# Altium PCB PCB_2020-01-04 23_18_01.pcbdoc
Units mil, origin at the board's own origin, x right, y up, seen from the top; angles counter-clockwise.
Board outline 5600 x 5600 mil, 2 copper layers (Top Layer, Bottom Layer); 60 components, 48 nets, 177 pads, 16 vias.
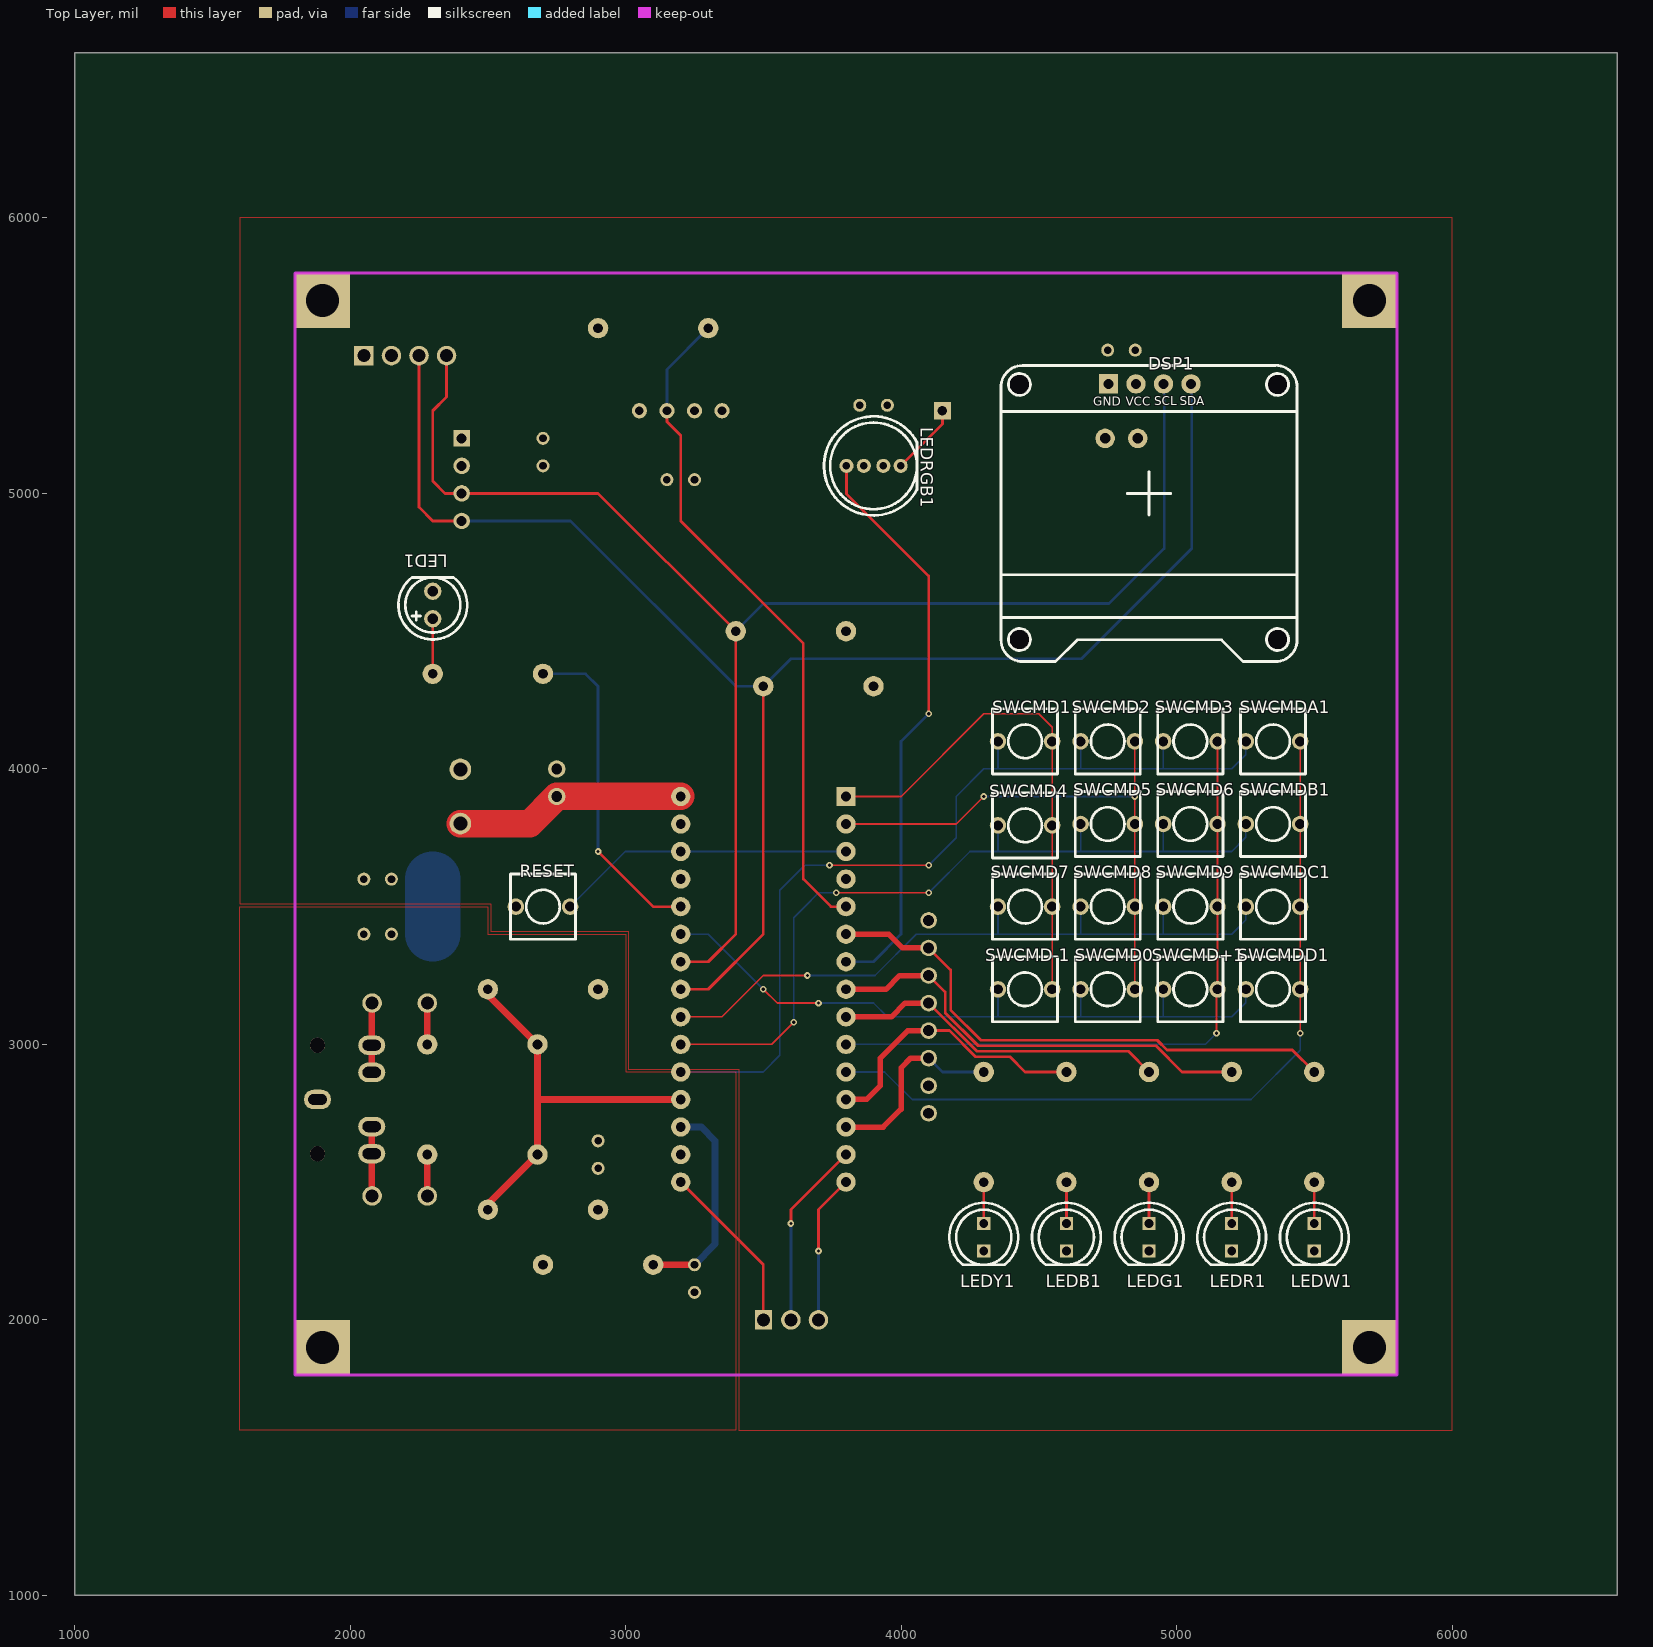
[diagram p0: Top Layer view]
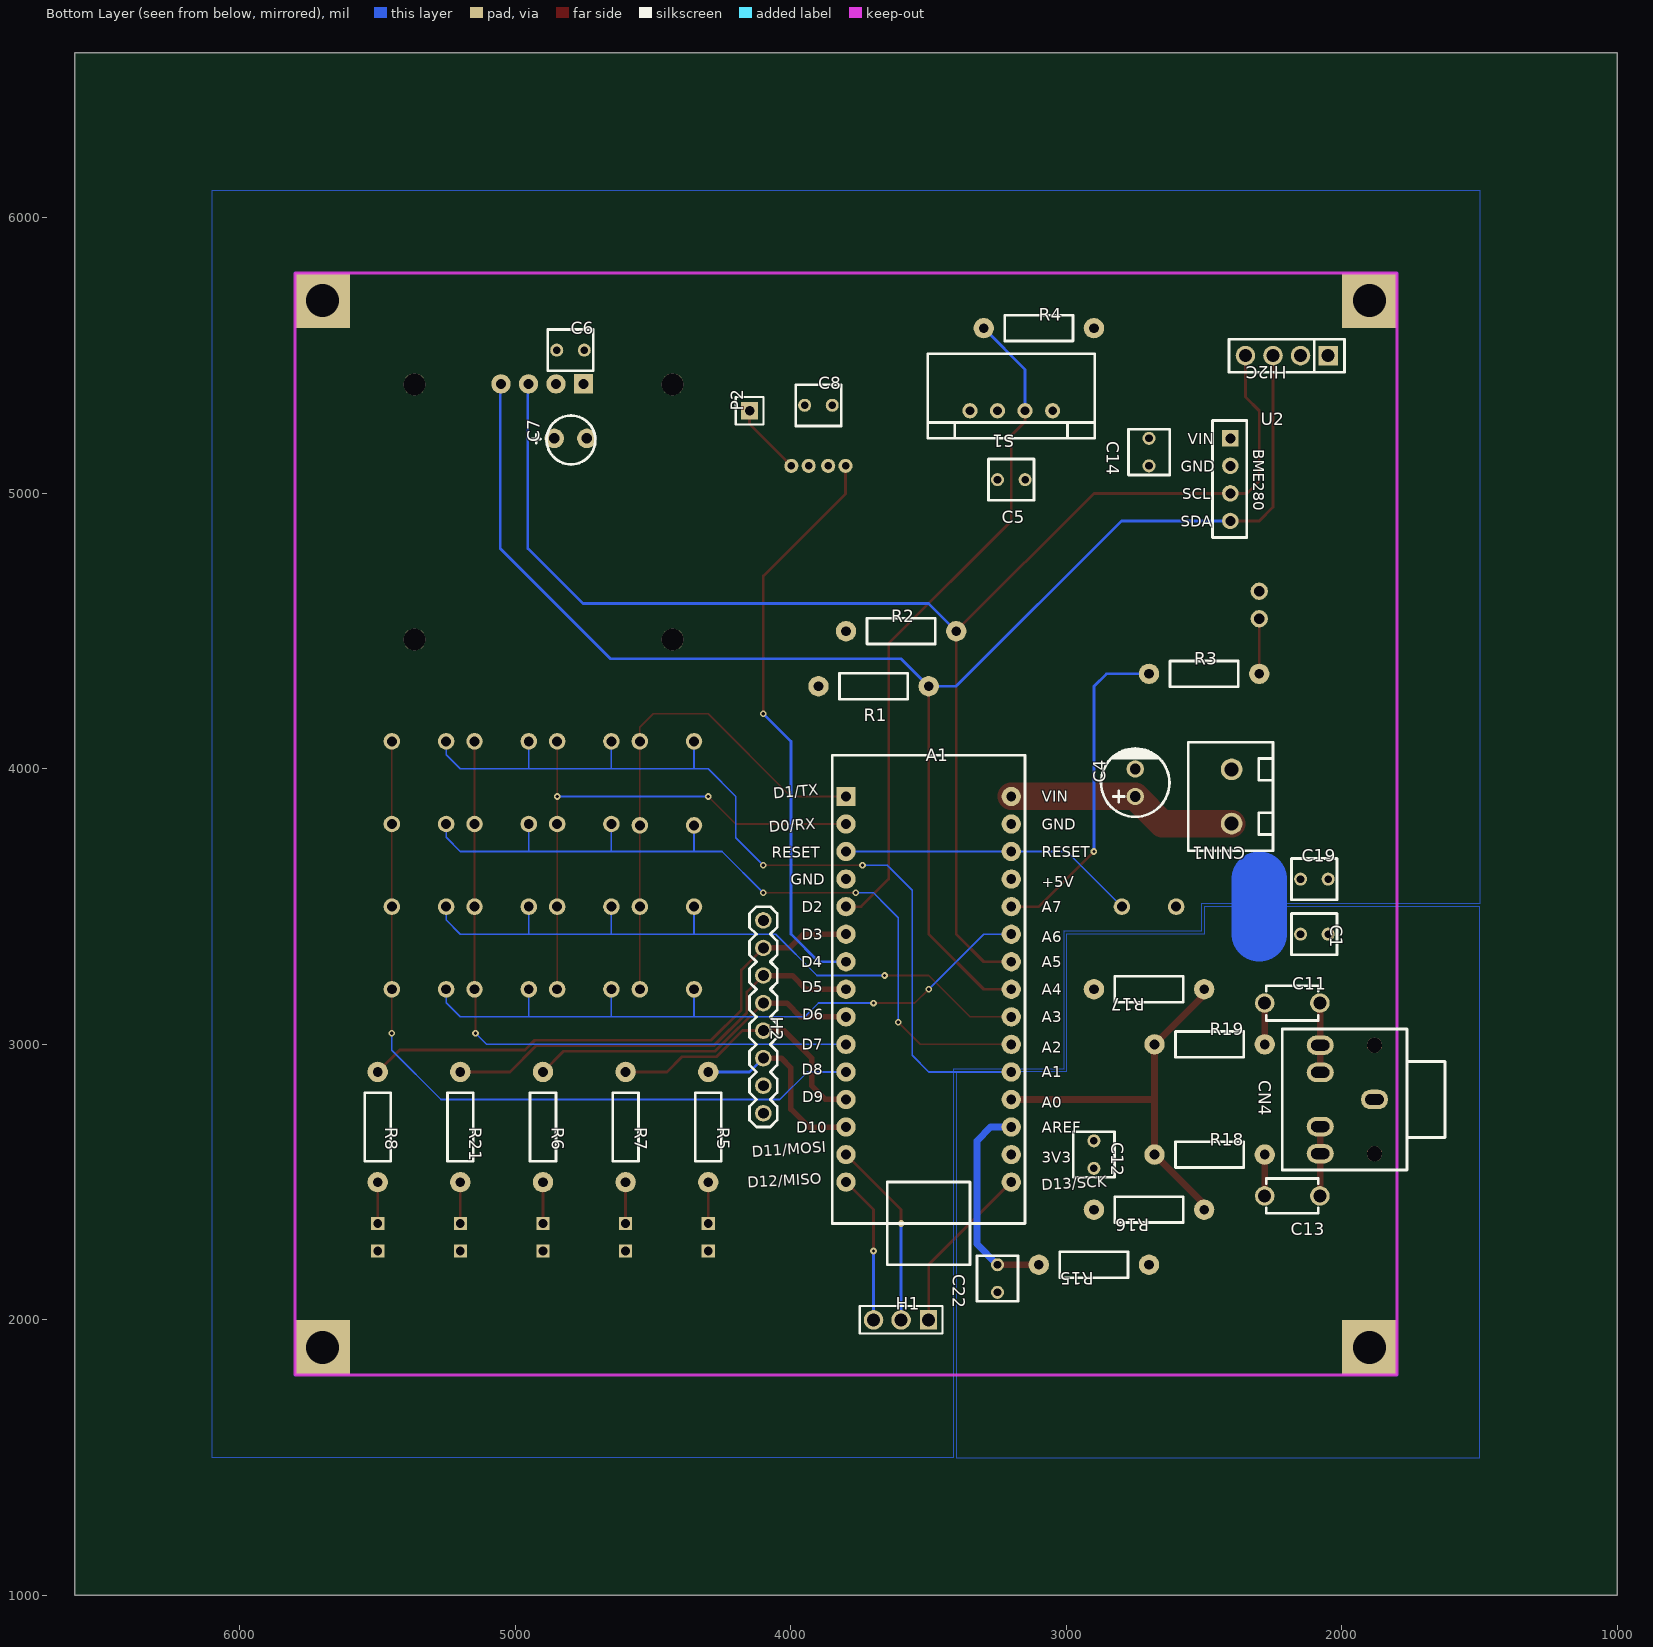
[diagram p1: Bottom Layer view, seen from below]

## Layer stack, top to bottom
Top Layer: signal copper (thickness not stored)
Dielectric: dielectric 12.6, FR-4, Dk 4.8
Bottom Layer: signal copper (thickness not stored)

## Board outline
6600,1000 1000,1000 1000,6600 6600,6600

## Components (designator, comment, footprint, x,y, rotation, side; value= is the part's Value field where it differs from the comment)
A1 "Arduino_Nano_V3" ARDUINO_NANO_V3 3500,3200 r0 bottom
C1 "1uF" CAP-CT4-0805-4.2X3.8 2100,3400 r180 bottom
C4 "100uF" CAP-TH_BD6.3-P2.50-D1.0-FD 2750,3950 r270 bottom
C5 "100nF" CAP-CT4-0805-4.2X3.8 3200,5050 r180 bottom
C6 "100nF" CAP-CT4-0805-4.2X3.8 4800,5520 r0 bottom
C7 "1uF" CAP-TAN-S2.5 4800,5200 r270 bottom
C8 "100nF" CAP-CT4-0805-4.2X3.8 3900,5320 r0 bottom
C11 "100nF" CAP-TH_L4.8-W3.2-P5.08-D1.2 2180,3150 r0 bottom
C12 "100nF" CAP-CT4-0805-4.2X3.8 2900,2600 r90 bottom
C13 "100nF" CAP-TH_L4.8-W3.2-P5.08-D1.2 2180,2450 r0 bottom
C14 "100nF" CAP-CT4-0805-4.2X3.8 2700,5150 r90 bottom
C19 "1uF" CAP-CT4-0805-4.2X3.8 2100,3600 r180 bottom
C22 "100nF" CAP-CT4-0805-4.2X3.8 3250,2150 r90 bottom
CN4 "PJ-317-B" AUDIO-SMD_3PIN_PJ-317-B 1980,2800 r90 bottom
CNIN1 "WJ126V-5.0-2P" WJ126V-5.0-2P 2400,3900 r180 bottom
DSP1 "SSD1306 DSP ARDUINO" SSD1306_ARDUINO 4900,5000 r0 top
H1 "Header-Male-2.54_1x3" HDR-TH_3P-P2.54-V 3600,2000 r180 bottom
H2 "Header-Male-2.54_1x8" 210S-1X8P 4100,3100 r90 bottom
HI2C "Header-Male-2.54_1x4" DIP-1X4P-2.54MM-M 2200,5500 r180 bottom
LED1 "LTL-4234" LED-TH_BD5.0-P2.54-FD 2300,4595 r90 top
LEDB1 "BLUE-5mm" LED-5MM 4600,2300 r270 top
LEDG1 "GREEN-5mm" LED-5MM 4900,2300 r270 top
LEDR1 "RED-5mm" LED-5MM 5200,2300 r270 top
LEDRGB1 "WS2812D-F8" LED-8.0-RGB4P 3900,5100 r180 top
LEDW1 "WHITE-5mm" LED-5MM 5500,2300 r270 top
LEDY1 "YELLOW-5mm" LED-5MM 4300,2300 r270 top
P2 "Header-Male-2.54_1x1" HDR-1X1/2.54 4150,5300 r270 bottom
R1 "1K" AXIAL-0.4 3700,4300 r180 bottom
R2 "1K" AXIAL-0.4 3600,4500 r180 bottom
R3 "220" AXIAL-0.4 2500,4345 r0 bottom
R4 "1K" AXIAL-0.4 3100,5600 r0 bottom
R5 "220" AXIAL-0.4 4300,2700 r90 bottom
R6 "220" AXIAL-0.4 4900,2700 r90 bottom
R7 "220" AXIAL-0.4 4600,2700 r90 bottom
R8 "220" AXIAL-0.4 5500,2700 r90 bottom
R15 "4.7K" AXIAL-0.4 2900,2200 r180 bottom
R16 "100K" AXIAL-0.4 2700,2400 r180 bottom
R17 "100K" AXIAL-0.4 2700,3200 r0 bottom
R18 "4.7K" AXIAL-0.4 2480,2600 r0 bottom
R19 "4.7K" AXIAL-0.4 2480,3000 r0 bottom
R21 "220" AXIAL-0.4 5200,2700 r90 bottom
RESET "KAN0654-0701A" KAN0654-0601B 2700,3500 r180 top
S1 "AM2302" AM2302 3200,5300 r180 bottom
SWCMD0 "KAN0654-0701A" KAN0654-0601B 4750,3200 r0 top
SWCMD1 "KAN0654-0701A" KAN0654-0601B 4450,4100 r0 top
SWCMD2 "KAN0654-0701A" KAN0654-0601B 4750,4100 r0 top
SWCMD3 "KAN0654-0701A" KAN0654-0601B 5050,4100 r0 top
SWCMD4 "KAN0654-0701A" KAN0654-0601B 4450,3795 r0 top
SWCMD5 "KAN0654-0701A" KAN0654-0601B 4750,3800 r0 top
SWCMD6 "KAN0654-0701A" KAN0654-0601B 5050,3800 r0 top
SWCMD7 "KAN0654-0701A" KAN0654-0601B 4450,3500 r0 top
SWCMD8 "KAN0654-0701A" KAN0654-0601B 4750,3500 r0 top
SWCMD9 "KAN0654-0701A" KAN0654-0601B 5050,3500 r0 top
SWCMD+1 "KAN0654-0701A" KAN0654-0601B 5050,3200 r0 top
SWCMD-1 "KAN0654-0701A" KAN0654-0601B 4450,3200 r0 top
SWCMDA1 "KAN0654-0701A" KAN0654-0601B 5350,4100 r0 top
SWCMDB1 "KAN0654-0701A" KAN0654-0601B 5350,3800 r0 top
SWCMDC1 "KAN0654-0701A" KAN0654-0601B 5350,3500 r0 top
SWCMDD1 "KAN0654-0701A" KAN0654-0601B 5350,3200 r0 top
U2 "BME280 DOC" "BME280 DOC" 2405,5200 r0 bottom

## Footprints (in the part's own frame and the unit in brackets; to place one, negate y for a bottom-side part, rotate by r counter-clockwise, add the part's x,y. Pads: shape width x height; smd on the part's side, far side on the other; paste and mask are expansions set on the pad)
210S-1X8P [mil]
  round 60 hole 39.37: 1(350,0) 2(250,0) 3(150,0) 4(50,0) 5(-50,0) 6(-150,0) 7(-250,0) 8(-350,0)
  silkscreen extent -400,-50 400,50
AM2302 [mm]
  round 1.4 hole 0.8: 1(3.81,0) 2(1.27,0) 3(-1.27,0) 4(-3.81,0)
  silkscreen extent -7.7,-2.54 7.71,5.26
ARDUINO_NANO_V3 [mil]
  rect 70x70 hole 36: 1(300,-700)
  round 70 hole 36: 2(300,-600) 3(300,-500) 4(300,-400) 5(300,-300) 6(300,-200) 7(300,-100) 8(300,0) 9(300,100) 10(300,200) 11(300,300) 12(300,400) 13(300,500) 14(300,600) 15(300,700) 16(-300,700) 17(-300,600) 18(-300,500) 19(-300,400) 20(-300,300) 21(-300,200) 22(-300,100) 23(-300,0) 24(-300,-100) 25(-300,-200) 26(-300,-300) 27(-300,-400) 28(-300,-500) 29(-300,-600) 30(-300,-700)
  silkscreen extent -350,-850 350,1000
AUDIO-SMD_3PIN_PJ-317-B [mm]
  oval 1.8x2.499 hole 1 slot 1.7 at 90 deg: 1(0,-2.5) 2(-5,2.5) 3(-2.5,2.5) 4(2.5,2.5) 5(5,2.5)
  round 1.397 hole 1.397 unplated: ""(-5,-2.5) ""(5,-2.5)
  silkscreen extent -6.5,-9 6.5,6
AXIAL-0.4 [mil]
  round 74 hole 35.4: 1(200,0) 2(-200,0)
  silkscreen extent -124,-47 124,47
"BME280 DOC" [mil]
  rect 60x60 hole 36: 1(0,0)
  round 60 hole 36: 2(0,100) 3(0,200) 4(0,300)
  silkscreen extent -60,-65 65,360
CAP-CT4-0805-4.2X3.8 [mm]
  round 1.2 hole 0.7: 1(1.27,0) 2(-1.27,0)
  silkscreen extent -2.1,-1.9 2.1,1.9
CAP-TAN-S2.5 [mm]
  round 1.8 hole 1: 1(0,-1.5) 2(0,1.5)
  silkscreen extent -2.1,-3.6 2.4,2.29
CAP-TH_BD6.3-P2.50-D1.0-FD [mm]
  round 1.6 hole 1: 1(1.27,0) 2(-1.27,0)
  silkscreen extent -3.17,-3.15 3.15,3.15
CAP-TH_L4.8-W3.2-P5.08-D1.2 [mm]
  round 1.8 hole 1.2: 1(2.54,0) 2(-2.54,0)
  silkscreen extent -2.4,-1.6 2.4,1.6
DIP-1X4P-2.54MM-M [mm]
  rect 1.8x1.8 hole 1.2: 1(3.81,0)
  round 1.8 hole 1.2: 2(1.27,0) 3(-1.27,0) 4(-3.81,0)
  silkscreen extent -5.33,-1.52 5.33,1.52
HDR-1X1/2.54 [mil]
  rect 62x62 hole 35: 1(0,0)
  silkscreen extent -50,-50 50,50
HDR-TH_3P-P2.54-V [mm]
  rect 1.575x1.8 hole 1.2: 1(2.54,0)
  round 1.8 hole 1.2: 2(0,0) 3(-2.54,0)
  silkscreen extent -3.81,-1.27 3.81,1.27
KAN0654-0601B [mil]
  round 60 hole 36: 1(-98.42,0) 2(98.43,0)
  silkscreen extent -118,-118 118,118
LED-5MM [mil]
  rect 47.7x47.7 hole 32: 1(-50,0) 2(50,0)
  silkscreen extent -125,-125 100,125
LED-8.0-RGB4P [mm]
  round 1.3 hole 0.7: 1(-2.499,0) 2(-0.899,0) 3(0.899,0) 4(2.499,0)
  silkscreen extent -4,-4.56 4.56,4.56
LED-TH_BD5.0-P2.54-FD [mm]
  round 1.6 hole 1: 1(-1.27,0) 2(1.27,0)
  silkscreen extent -3.17,-3.17 2.54,3.17
SSD1306_ARDUINO [mil]
  rect 70x70 hole 36: 1(-147.4,397.6)
  round 70 hole 36: 2(-47.4,397.63) 3(52.6,397.63) 4(152.6,397.63)
  round 80 hole 80 unplated: ""(-470.51,-530.27) ""(-470.51,395.63) ""(466.5,-530.27) ""(466.5,395.63)
  silkscreen extent -538,-610 538,465
WJ126V-5.0-2P [mm]
  round 2 hole 1.3: 1(0,-2.501) 2(0,2.501)
  silkscreen extent -4,-5 3.8,5

## Free pads (board coordinates)
  rect 200x200 hole 120: 1(1900,1900) 1(1900,5700) 1(5700,1900) 1(5700,5700)

## Via types
v1: diameter 24, hole 12, Top Layer to Bottom Layer, 16 vias

## Nets (pads, with @x,y where several pads share a name; then routed paths per layer and width w, separated by ;. In a path a pad name is that pad's centre, name@x,y a point inside that pad or via, vN(x,y) a via of type N, cw(c..) or ccw(c..) an arc to the next point about the centre after c; other vN are vias at no path point)
+3V3: A1.17 C1.1 C12.1 R15.1 R16.2
+5V: A1.27 C5.1 C6.1 C7.1 C8.1 C14.1 C19.1 DSP1.2 HI2C.2 LEDRGB1.2 R1.2 R2.2 R4.2 S1.1 U2.1
+12V: A1.30 C4.1 CNIN1.1 | length 840.8
  Top Layer w100: CNIN1.1 2651.55,3801.55 C4.1 A1.30
A0: A1.19 R16.1 R17.2 R18.1 R19.1 | length 1469.1
  Top Layer w25: R16.1 2500,2420 R18.1 R19.1 2500,3180 R17.2 ; 2680,2800 A1.19
C1: A1.1 SWCMD1.2 SWCMD4.2 SWCMD7.2 SWCMD-1.2 | length 1844.3
  Top Layer w6: A1.1 4000,3900 4300,4200 4500,4200 4548.43,4151.57 SWCMD1.2 SWCMD4.2 SWCMD7.2 SWCMD-1.2
C2: A1.2 SWCMD0.2 SWCMD2.2 SWCMD5.2 SWCMD8.2 | length 1989.9
  Top Layer w6: A1.2 4200,3800 v1(4300,3900) ; SWCMD0.2 SWCMD8.2 SWCMD5.2 v1(4848.43,3900) SWCMD2.2
  Bottom Layer w6: v1(4300,3900) v1(4848.43,3900)
C3: A1.10 SWCMD3.2 SWCMD6.2 SWCMD9.2 SWCMD+1.2 | length 2423
  Top Layer w6: v1(5145,3040) 5145,3196.57 SWCMD+1.2 SWCMD9.2 SWCMD6.2 SWCMD3.2
  Bottom Layer w6: A1.10 5105,3000 v1(5145,3040)
C4: A1.11 SWCMDA1.2 SWCMDB1.2 SWCMDC1.2 SWCMDD1.2 | length 2885.3
  Top Layer w6: v1(5448.43,3040) SWCMDD1.2 SWCMDC1.2 SWCMDB1.2 SWCMDA1.2
  Bottom Layer w6: A1.11 3940,2900 4040,2800 5270,2800 5448.4,2978.4 v1(5448.43,3040)
C11_2: C11.2 CN4.4 CN4.5 | length 252.2
  Top Layer w25: CN4.4 CN4.5 2078.43,3148.43 C11.2
C13_2: C13.2 CN4.2 CN4.3 | length 252.2
  Top Layer w25: CN4.3 CN4.2 2078.43,2451.57 C13.2
D11/PWM/MOSI: A1.14 H1.2 | length 682.8
  Top Layer w10: v1(3600,2350) 3600,2400 A1.14
  Bottom Layer w10: H1.2 v1(3600,2350)
D12/MISO: A1.15 H1.3 | length 541.4
  Top Layer w10: v1(3700,2250) 3700,2400 A1.15
  Bottom Layer w10: H1.3 v1(3700,2250)
D13/SCK: A1.16 H1.1 | length 624.3
  Top Layer w10: A1.16 3500,2200 H1.1
DATA: A1.5 R4.1 S1.2 | length 2463.6
  Top Layer w10: S1.2 3150,5260 3200,5210 3200,4900 3645,4455 3645,3600 3745,3500 A1.5
  Bottom Layer w10: S1.2 3150,5450 R4.1
GND: A1.4 A1.29 C1.2 C4.2 C5.2 C6.2 C7.2 C8.2 C12.2 C14.2 C19.2 C22.2 CN4.1 CNIN1.2 DSP1.1 H2.1 H2.7 H2.8 HI2C.1 LED1.2 LEDB1.2 LEDG1.2 LEDR1.2 LEDRGB1.3 LEDW1.2 LEDY1.2 pad.1 R17.1 RESET.2 S1.3 S1.4 U2.2 | length 200
  Bottom Layer w200: 2300,3400 2300,3600
LED1_1: LED1.1 R3.2 | length 200
  Top Layer w10: R3.2 LED1.1
LEDB: A1.12 H2.5 R7.1 | length 1024.3
  Top Layer w10: H2.5 4175,3050 4270,2955 4395,2955 4450,2900 R7.1
  Top Layer w20: A1.12 3875,2800 3925,2850 3925,2950 4025,3050 H2.5
LEDDATA: A1.7 LEDRGB1.4 | length 2106.4
  Top Layer w10: LEDRGB1.4 3801.6,4998.4 4100,4700 v1(4100,4200)
  Bottom Layer w10: A1.7 3900,3300 4000,3400 4000,4100 v1(4100,4200)
LEDG: A1.9 H2.4 R6.1 | length 1224.3
  Top Layer w10: H2.4 4275,2975 4825,2975 R6.1
  Top Layer w20: A1.9 3965,3100 4015,3150 H2.4
LEDR: A1.8 H2.3 R21.1 | length 1609.6
  Top Layer w10: H2.3 4160,3190 4160,3115 4280,2995 4925,2995 5020,2900 R21.1
  Top Layer w20: A1.8 3945,3200 3995,3250 H2.3
LEDRGB1_1: LEDRGB1.1 P2.1 | length 262.8
  Top Layer w10: LEDRGB1.1 4150,5251.6 P2.1
LEDS: A1.26 R3.1 | length 1201.5
  Top Layer w10: v1(2900,3700) 3100,3500 A1.26
  Bottom Layer w10: R3.1 2855,4345 2900,4300 v1(2900,3700)
LEDW: A1.6 H2.2 R8.1 | length 1992
  Top Layer w10: H2.2 4180,3270 4180,3125 4290,3015 4930,3015 4965,2980 5420,2980 R8.1
  Top Layer w20: A1.6 3955,3400 4005,3350 H2.2
LEDY: A1.13 H2.6 R5.1 | length 712.1
  Top Layer w20: A1.13 3935,2700 4000,2765 4000,2915 4035,2950 H2.6
  Bottom Layer w10: H2.6 4150,2900 R5.1
R1: A1.20 SWCMD1.1 SWCMD2.1 SWCMD3.1 SWCMDA1.1 | length 3316.3
  Top Layer w6: v1(3740,3650) v1(4100,3650)
  Bottom Layer w6: A1.20 3500,2900 3560,2960 3560,3560 3650,3650 v1(3740,3650) ; v1(4100,3650) 4200,3750 4200,3900 4300,4000 5200,4000 5251.58,4051.58 SWCMDA1.1 ; 4351.58,4000 SWCMD1.1 ; 4651.58,4000 SWCMD2.1 ; 4951.58,4000 SWCMD3.1
R2: A1.21 SWCMD4.1 SWCMD5.1 SWCMD6.1 SWCMDB1.1 | length 2928.9
  Top Layer w6: A1.21 3530,3000 v1(3610,3080) ; v1(3765,3550) v1(4100,3550)
  Bottom Layer w6: v1(3610,3080) 3610,3460 3650,3500 3700,3550 v1(3765,3550) ; v1(4100,3550) 4250,3700 4300,3700 5200,3700 5251.58,3751.58 SWCMDB1.1 ; 4351.58,3700 SWCMD4.1 ; 4651.58,3700 SWCMD5.1 ; 4951.58,3700 SWCMD6.1
R3: A1.22 SWCMD7.1 SWCMD8.1 SWCMD9.1 SWCMDC1.1 | length 2545.6
  Top Layer w6: A1.22 3350,3100 3500,3250 v1(3660,3250)
  Bottom Layer w6: v1(3660,3250) 3905,3250 4055,3400 4300,3400 5200,3400 5251.58,3451.58 SWCMDC1.1 ; 4351.58,3400 SWCMD7.1 ; 4651.58,3400 SWCMD8.1 ; 4951.58,3400 SWCMD9.1
R4: A1.25 SWCMD0.1 SWCMD+1.1 SWCMD-1.1 SWCMDD1.1 | length 2545.6
  Top Layer w6: v1(3500,3200) 3550,3150 v1(3700,3150)
  Bottom Layer w6: A1.25 3300,3400 v1(3500,3200) ; v1(3700,3150) 3900,3150 3950,3100 4300,3100 5200,3100 5251.58,3151.58 SWCMDD1.1 ; 4351.58,3100 SWCMD-1.1 ; 4651.58,3100 SWCMD0.1 ; 4951.58,3100 SWCMD+1.1
R5_2: LEDY1.1 R5.2 | length 150
  Top Layer w10: LEDY1.1 R5.2
R6_2: LEDG1.1 R6.2 | length 150
  Top Layer w10: LEDG1.1 R6.2
R7_2: LEDB1.1 R7.2 | length 150
  Top Layer w10: LEDB1.1 R7.2
R8_2: LEDW1.1 R8.2 | length 150
  Top Layer w10: LEDW1.1 R8.2
R18_2: C13.1 R18.2 | length 150
  Top Layer w25: C13.1 R18.2
R19_2: C11.1 R19.2 | length 150
  Top Layer w25: R19.2 C11.1
R21_2: LEDR1.1 R21.2 | length 150
  Top Layer w10: LEDR1.1 R21.2
RST: A1.3 A1.28 RESET.1 | length 1109.4
  Bottom Layer w6: RESET.1 2998.42,3700 A1.28 A1.3@3825,3700
S$6: 
S$12: 
S$14: 
S$15: 
S$17: 
S$150: 
S$152: 
S$180: 
S$236: 
SCL: A1.24 DSP1.3 HI2C.4 R2.1 U2.3 | length 5420.8
  Top Layer w10: HI2C.4 2350,5350 2300,5300 2300,5045 2345,5000 U2.3 2900,5000 R2.1 3400,3400 3300,3300 A1.24
  Bottom Layer w10: R2.1 3500,4600 4755,4600 4955,4800 4955,5395.23 DSP1.3
SDA: A1.23 DSP1.4 HI2C.3 R1.1 U2.4 | length 5712.8
  Top Layer w10: HI2C.3 2250,4950 2300,4900 U2.4 ; A1.23 3300,3200 3500,3400 R1.1
  Bottom Layer w10: U2.4 2800,4900 3400,4300 R1.1 3600,4400 4655,4400 5055,4800 5055,5395.23 DSP1.4
VREF: A1.18 C22.1 R15.2 | length 776.8
  Top Layer w25: R15.2 C22.1
  Bottom Layer w25: A1.18 3275,2700 3325,2650 3325,2275 C22.1
pads on no net: CN4. DSP1.

## Polygon pours and split planes (outlines as drawn)
GND on Bottom Layer (solid): 1500,3500 2500,3500 2500,3400 3000,3400 3000,2900 3400,2900 3400,1500 1500,1500
GND on Bottom Layer (solid): 1500,6100 1500,3510 2510,3510 2510,3410 3010,3410 3010,2910 3410,2910 3410,1500 6100,1500 6100,6100
+3V3 on Top Layer (solid): 1600,3500 2500,3500 2500,3400 3000,3400 3000,2900 3400,2900 3400,1600 1600,1600
+5V on Top Layer (solid): 1600,6000 1600,3510 2510,3510 2510,3410 3010,3410 3010,2910 3410,2910 3410,1600 6000,1600 6000,6000

## Text inside footprints (layer, text, board x,y; h text height)
A1: Bottom Overlay "D1/TX" at 4061.96,3890.98 h40 r355; Bottom Overlay "GND" at 3090,3780 h40; Bottom Overlay "+5V" at 3090,3570 h40; Bottom Overlay "D12/MISO" at 4156.85,2480.03 h40 r357; Bottom Overlay "VIN" at 3090,3880 h40; Bottom Overlay "D13/SCK" at 3088.95,2470.03 h40 r357; Bottom Overlay "GND" at 3999.7,3580 h40; Bottom Overlay "D0/RX" at 4078.6,3770.95 h40 r356; Bottom Overlay "RESET" at 4069.1,3678.2 h40; Bottom Overlay "D2" at 3960.4,3480 h40; Bottom Overlay "D3" at 3960.4,3380 h40; Bottom Overlay "D4" at 3962.2,3280 h40; Bottom Overlay "D5" at 3960.4,3190 h40; Bottom Overlay "D6" at 3958.6,3090 h40; Bottom Overlay "D7" at 3960.4,2980 h40; Bottom Overlay "D8" at 3960.4,2890 h40; Bottom Overlay "D9" at 3958.6,2790 h40; Bottom Overlay "D10" at 3981.5,2680 h40; Bottom Overlay "D11/MOSI" at 4140.1,2590.05 h40 r356; Bottom Overlay "3V3" at 3090,2570 h40; Bottom Overlay "AREF" at 3090,2680 h40; Bottom Overlay "A0" at 3090,2770 h40; Bottom Overlay "A2" at 3090,2970 h40; Bottom Overlay "A3" at 3090,3080 h40; Bottom Overlay "A4" at 3090,3180 h40; Bottom Overlay "A5" at 3090,3280 h40; Bottom Overlay "A6" at 3090,3370 h40; Bottom Overlay "A7" at 3090,3480 h40; Bottom Overlay "RESET" at 3090,3680 h40
DSP1: Top Overlay "VCC" at 4815.4,5318.98 h31.5; Top Overlay "GND" at 4697.2,5318.88 h31.5; Top Overlay "SCL" at 4919.7,5319.78 h31.5; Top Overlay "SDA" at 5012.2,5319.38 h31.5
U2: Bottom Overlay "VIN" at 2560,5178.2 h40; Bottom Overlay "GND" at 2585,5078.2 h40; Bottom Overlay "SCL" at 2580,4978.2 h40; Bottom Overlay "SDA" at 2585,4878.2 h40; Bottom Overlay "BME280" at 2321.8,5160 h40 r90